# Altium PCB SolarNode.PcbDoc (part 2 of 2)
Units mil, origin at the board's own origin, x right, y up, seen from the top; angles counter-clockwise.
Board outline 7250 x 4975 mil, 2 copper layers (Top Layer, Bottom Layer); 206 components, 187 nets, 727 pads, 156 vias.
Unrouted connection lines stored in the file: 1.
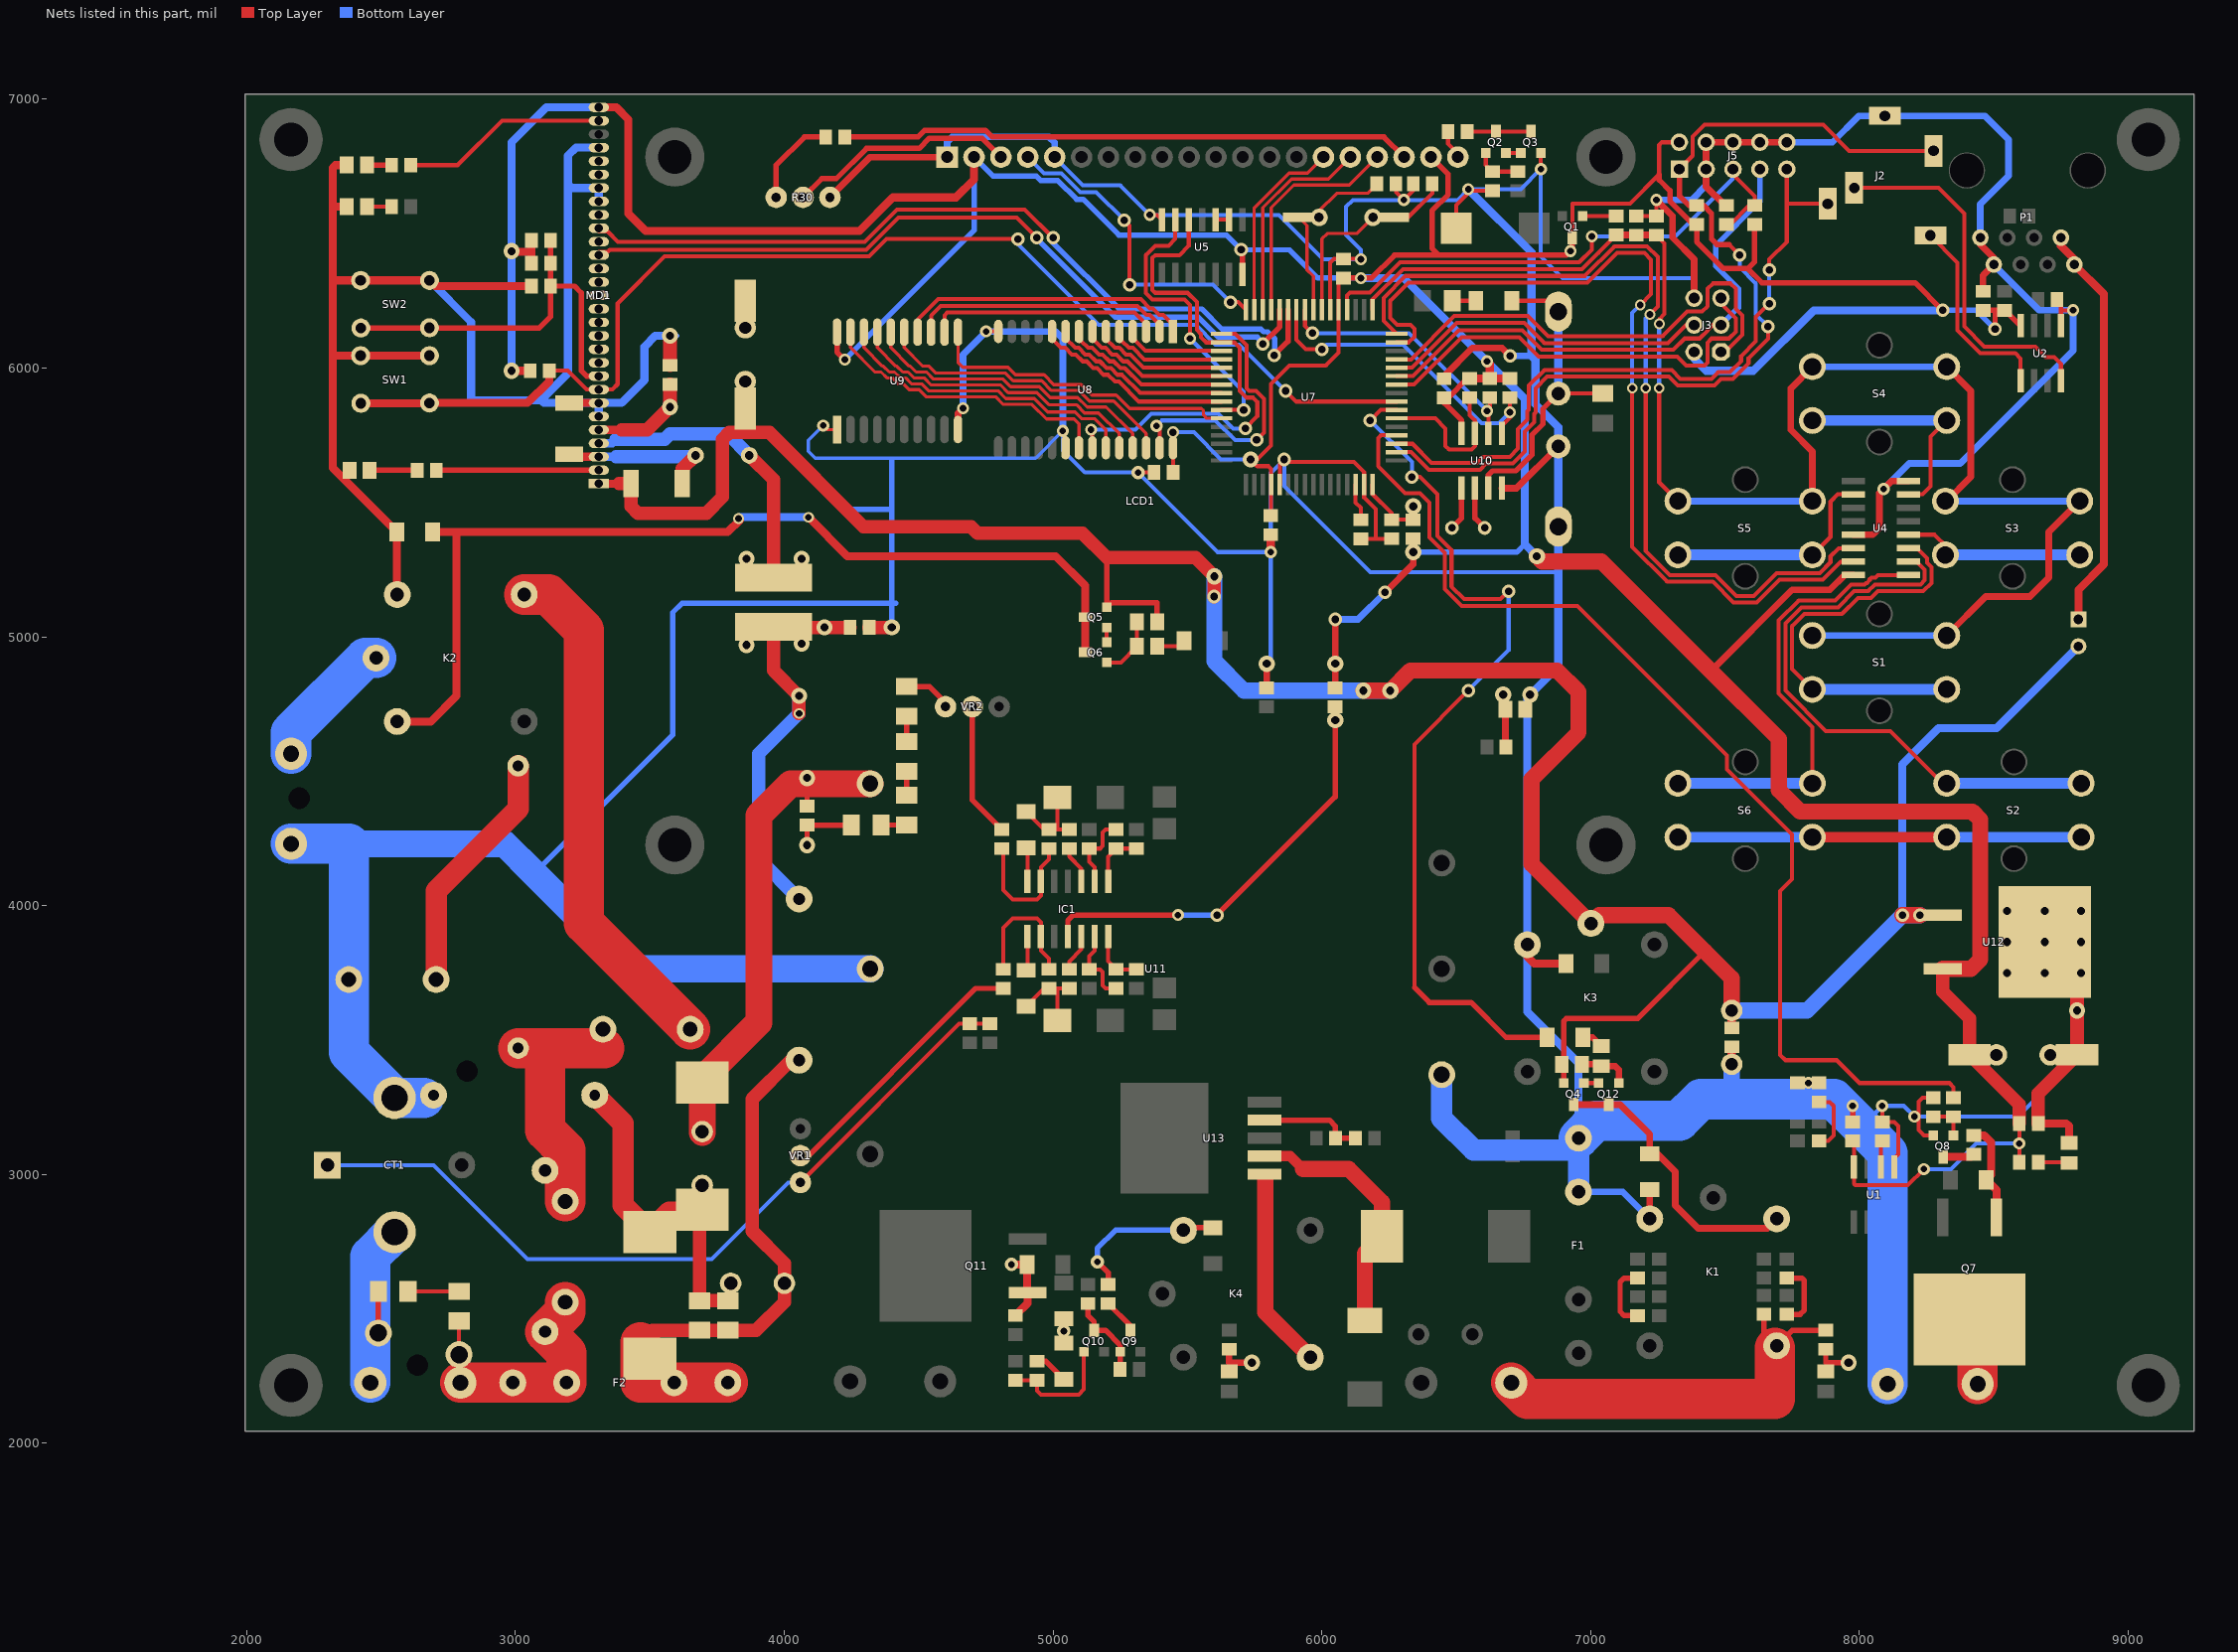
[diagram p2: the nets of this part, all layers, seen from the top]

## Via types
v1: diameter 50, hole 28, Top Layer to Bottom Layer, 46 vias
v2: diameter 60, hole 30, Top Layer to Bottom Layer, 35 vias
v3: diameter 45, hole 25, Top Layer to Bottom Layer, 29 vias
v4: diameter 50, hole 25, Top Layer to Bottom Layer, 24 vias
v5: diameter 40, hole 25, Top Layer to Bottom Layer, 9 vias
v6: diameter 60, hole 32, Top Layer to Bottom Layer, 8 vias
v7: diameter 45, hole 24, Top Layer to Bottom Layer, 4 vias
v8: diameter 45, hole 28, Top Layer to Bottom Layer, 1 vias

## Nets (pads, with @x,y where several pads share a name; then routed paths per layer and width w, separated by ;. In a path a pad name is that pad's centre, name@x,y a point inside that pad or via, vN(x,y) a via of type N, cw(c..) or ccw(c..) an arc to the next point about the centre after c; other vN are vias at no path point) (continued)
GND: B1.2 C1.2 C2.2 C4.2 C10.2 C11.2 C12.2 C13.2 C14.2 C19.2 C20.2 C21.2 C22.1 C23.2 C24.2 C25.1 C26.1 C27.2 C29.2 C35.1 C36.2 C37.2 C38.2 C39.2 C41.2 CT1.2 D3.1 D4.1 D5.1 D9.1 F1.1 J2.1 J3.6 J5.3 J5.4 J5.6 J5.8 J5.10 J7.2 J8.2 K1.5 K2.4 K3.5 L5.2 L6.2 L9.2 L15.2 LCD1.1 LCD1.5 LED1.2 LED2.2 LED3.2 LED5.2 LED6.2 MD1.6 MD1.7 MD1.22 MD1.23 MD1.26 P1.1 P1.2 Q3.2 Q8.2 R6.2 R30.1 R32.1 R35.1 R57.1 R72.2 SC1.2 SW1.2 SW1.3 SW2.2 SW2.3 U1.5 U2.5 U4.8 U4.13 U5.7 U7.22 U7.53 U7.63 U8.14 U8.20 U9.1 U9.10 U10.4 U11.2 U11.4 U12.4 | length 39511.2
  Top Layer w12: v3(4145,5786.25) 4160,5771.25 U9.1@4196.42,5771.25
  Top Layer w15: v7(4751.42,6136.25) U8.14@4796.42,6136.25 ; v4(5316.42,5611.25) C19.2@5375.99,5611.25 ; v3(5360,6570) 5387.36,6570 U5.7@5405,6552.36 ; U7.53@5843.42,5566.25 5843.42,5643.42 v1(5860,5660) 5870,5650 6120,5650 6157.42,5612.58 U7.63@6157.42,5566.25 6157.42,5517.58 6200,5475 6200,5365 ; U7.22@6031.42,6217.25 6031.42,6391.42 6045.79,6405.79 C24.2@6080,6405.79 6144.21,6405.79 v3(6145,6405) ; C21.2@6145,5364.57 6259.64,5364.57 C22.1@6260,5364.92 ; C26.1@6275.87,6685.36 6275.87,6654.49 v3(6305,6625.36) 6340,6660.36 C25.1@6340,6685.36 ; C13.2@6500,6520.36 6500,6605.36 6554.57,6659.92 R35.1@6635,6659.92 ; v3(6815,6740.36) Q3.2@6815,6800.36 ; R32.1@7170,6565.36 C14.2@7245,6565.36 v3(7245,6625.36) ; v3(8085,3255) C2.2@8085,3195.43 8129.57,3195.43 8145,3180 8145,3075 8130,3060 U1.5@8130,3027.36 ; Q8.2@8275,3145 8240,3145 8220,3165 8220,3270 8235.43,3285.43 R57.1@8275,3285.43 ; R72.2@8735.43,6255 8750,6240.43 8750,6215 ; U2.5@8750,6157.36 8750,6215 ; v3(8795,6215) 8750,6215
  Top Layer w20: C4.2@7770,3340.43 R6.2@7850,3340.43 ; C1.2@7975,3195.43 v3(7975,3255)
  Top Layer w25: R30.1@4170,6635 4319.88,6784.88 LCD1.1@4606.02,6784.88 ; U9.10@4646.42,5771.25 4646.42,5831.42 v3(4665,5850) ; L15.2@5795,4810.43 v2(5795,4900) ; C27.2@6455,5960.43 6455,5970 6560,6075 6670,6075 v1(6700,6045) ; U10.4@6670,5552.99 6724.49,5552.99 SC1.2@6880,5708.5 ; F1.1@6955,2935 F1.1@6963.07,2943.07 ; K1.5@7220,2835 D4.1@7220,2943.07 ; v3(7245,6625.36) 7305,6565.36 7305,6485 7385,6405 J3.6@7385,6260 ; C20.2@7505,6605.43 7499.57,6605.43 7430,6675 J5.3@7430,6740 J5.4@7430,6840 J5.6@7530,6840 J5.8@7630,6840 J5.10@7730,6840 ; U4.13@7977.64,5380 8050,5380 8075,5405 8075,5535 v3(8090,5550) 8120,5580 U4.8@8182.36,5580 ; P1.1@8450,6485 8450,6460 8500,6410 P1.2@8500,6385 8460,6345 C10.2@8460,6285.43
  Top Layer w30: 2320,6600 LED3.2@2372.6,6600 ; 2321,6046 SW1.3@2424,6046 SW1.2@2680,6046 ; 2324,6326 SW2.3@2424,6326 SW2.2@2680,6326 2701,6305 C29.2@3059.57,6305 ; LED2.2@2372.6,6755 2330,6755 2320,6745 2320,5628.07 D5.1@2558.07,5390 2558.07,5159.37 K2.4@2560,5157.44 ; D3.1@3200,5870.47 3309.53,5870.47 MD1.7@3310,5870 ; v3(5810,5315.36) C23.2@5810,5379.92 ; K3.5@6765,3855 6765,3810 6790,3785 D9.1@6908.07,3785 ; C36.2@7525,3410 C37.2@7525,3474.57 ; C39.2@8665.43,3190 8770,3190 8780,3180 LED6.2@8780,3117.4
  Top Layer w50: L6.2@3575,6010.43 v2(3575,6120) ; L5.2@4315.43,5035 v2(4400,5035) ; C39.2@8665.43,3190 8665.43,3300.43 C38.2@8810,3445 v2(8810,3610) 8810,3744.76 v2(8689.76,3865)
  Bottom Layer w12: v3(4145,5786.25) 4090,5731.25 4090,5690 4115,5665 4935.17,5665 v7(5036.42,5766.25)
  Bottom Layer w15: LCD1.5@5006.1,6784.88 5110.99,6680 5250,6680 v3(5360,6570) 5840,6570 6005,6405 v3(6145,6405) 6145,6440 6090,6495 6090,6600 6115.36,6625.36 v3(6305,6625.36) 6505.36,6625.36 v3(6545,6665) 6739.64,6665 v3(6815,6740.36) 6815,6415 6895,6335 7385,6335 ; v7(5036.42,5766.25) 5036.42,5693.58 5118.75,5611.25 v4(5316.42,5611.25) 5612.32,5315.36 v3(5810,5315.36) ; v2(5795,4900) 5810,4915 v3(5810,5315.36) ; 6875,5240 6180,5240 5860,5560 v1(5860,5660) 5810,5610 v3(5810,5315.36) ; 8005,3180 8010,3180 v3(8085,3255) 8165,3255 v3(8205,3215) 8590,3215 8815,3440
  Bottom Layer w20: 3070,4120 3585,4635 3585,5090 3620,5125 4400,5125 ; v2(3575,6120) v2@3600,6120 ; 4245,5475 4400,5475 ; v2(4400,5035) 4400,5125 ; 4400,5660 4400,5475 ; 4415,5125 4400,5125 ; 4400,5125 4400,5475
  Bottom Layer w25: LCD1.1@4606.02,6784.88 4606.02,6841.02 4625,6860 4985,6860 5006.1,6838.9 LCD1.5@5006.1,6784.88 ; v3(4665,5850) 4665,6049.83 v7(4751.42,6136.25) 5008.75,6136.25 5036.42,6108.58 v7(5036.42,5766.25) ; v1(6700,6045) 6780,6045 ; F1.1@6955,2935 7120,2935 K1.5@7220,2835 ; v3(7245,6625.36) 7375.36,6625.36 7430,6680 J5.3@7430,6740 ; J3.6@7385,6260 7385,6335 ; J5.10@7730,6840 7900,6840 7998.07,6938.07 J2.1@8095,6938.07 8466.93,6938.07 8555,6850 8555,6715 8450,6610 P1.1@8450,6485 ; v3(8090,5550) 8185,5645 8375,5645 8795,6065 v3(8795,6215) 8670,6215 P1.2@8500,6385
  Bottom Layer w30: SW2.2@2680,6326 2835,6171 2835,5880 3095,5880 ; MD1.6@3310,5820 MD1.7@3310,5870 ; MD1.22@3310,6620 MD1.23@3310,6670 3210,6670 3195,6685 ; MD1.26@3310,6820 3225,6820 3195,6790 3195,6685 ; v2(3575,6120) 3520,6120 3480,6080 3480,5955 3395,5870 MD1.7@3310,5870 ; v3(6545,6665) 6780,6430 6780,6045 6795,6030 6795,5865 6880,5780 SC1.2@6880,5708.5 B1.2@6880,5410.36 6880,4890 v6(6775,4785) 6765,4775 K3.5@6765,3855 6765,3605 6955,3415 F1.1@6955,3135 ; 3095,5880 3195,5980 3195,6685 ; 3095,5880 3105,5870 MD1.7@3310,5870
  Bottom Layer w60: 7520,3280 7525,3285 C36.2@7525,3410
  Bottom Layer w80: U11.4@6445.98,3371.3 6445.98,3209.02 6565,3090 6910,3090 F1.1@6955,3135 F1.1@6955,2935
  Bottom Layer w100: 2380,4230 2960,4230 3070,4120 3425,3765 U11.2@4320,3765
  Bottom Layer w150: J7.2@2165,4230 2380,4230 L9.2@2380,3725 2380,3455 CT1.2@2550,3285 C35.1@2660,3285 ; F1.1@6955,3135 7020,3200 7330,3200 7410,3280 7520,3280 7905,3280 8005,3180 8105,3080 J8.2@8105,2220
  other v2: 8550,3750 8689.76,3750 8825,3750 8550,3865 8825,3865 8550,3980 8689.76,3980 8825,3980
  other v3: 7810,3340.43
IO_0: MD1.10
IO_1: MD1.11
IO_2: MD1.12
IO_3: MD1.13
IO_4: MD1.14
IO_5: MD1.15
IO_6: MD1.16
IO_7: MD1.17
IO_8: MD1.18 U7.28 | length 2876.1
  Top Layer w15: MD1.18@3310,6432.5 3343.03,6432.5 3350.53,6440 4305,6440 4425,6560 4865,6560 v1(4940,6485)
  Top Layer w20: v1(5780,6090) 5843.42,6153.42 U7.28@5843.42,6217.25
  Bottom Layer w20: v1(4940,6485) 4940,6481.36 5231.36,6190 5540,6190 5615,6115 5760,6115 5780,6095 v1(5780,6090)
IO_9: MD1.19
IO_10: MD1.20 U7.27 | length 3044.2
  Top Layer w15: MD1.20@3310,6507.5 3343.03,6507.5 3380.53,6470 4299.64,6470 4419.64,6590 4895.1,6590 5000,6485.1 v1(5000,6485)
  Top Layer w20: v1(5822.43,6047.57) 5874.42,6099.57 U7.27@5874.42,6217.25
  Bottom Layer w20: v1(5000,6485) 5000,6466 5245,6221 5280,6221 5281,6220 5553.84,6220 5628.84,6145 5773.84,6145 5783.84,6135 5798.64,6135 5825,6108.64 5825,6050.15 v1(5822.43,6047.57)
IO_11: MD1.21
LCD_CS1: LCD1.15 U7.31 | length 714.7
  Top Layer w12: U7.31@5748.42,6217.25 5748.42,6596.09 5877.69,6725.36 5946.57,6725.36 LCD1.15@6006.1,6784.88
LCD_CS2: LCD1.16 U7.30 | length 783.2
  Top Layer w12: U7.30@5780.42,6217.25 5780.42,6596.98 5886.8,6703.36 6024.57,6703.36 LCD1.16@6106.1,6784.88
LCD_DMA_EN: U5.6 U7.42 | length 1087.2
  Top Layer w15: U5.6@5455,6552.36 5455,6480 5430,6455 5379.64,6455 5345,6420.36 5345,6279.64 5369.64,6255 5489.64,6255 5510,6234.64 v3(5510,6110) ; U7.42@5626.42,5844.25 v1(5709.25,5844.25)
  Bottom Layer w15: v3(5510,6110) 5709.25,5910.75 v1(5709.25,5844.25)
LCD_RS: LCD1.4 U7.32 | length 1175.3
  Top Layer w15: v1(5265,6550) 5285,6530 v1(5285,6310) ; v1(5660,6245) 5689.67,6245 U7.32@5717.42,6217.25
  Bottom Layer w15: LCD1.4@4906.1,6784.88 4965.99,6725 5030.63,6725 5100.63,6655 5160,6655 v1(5265,6550) ; v1(5285,6310) 5595,6310 v1(5660,6245)
LCD_RST: LCD1.17 U7.29 | length 852.2
  Top Layer w12: U7.29@5811.42,6217.25 5811.42,6596.86 5895.91,6681.36 6102.57,6681.36 LCD1.17@6206.1,6784.88
MCU_RST: C20.1 J5.5 R36.1 U7.20 | length 1999.5
  Top Layer w15: U7.20@6094.42,6217.25 6094.42,6269.78 6105,6280.36 6178.93,6280.36 6291.43,6392.86 6957.5,6392.86 7005,6440.36 v3(7005,6490) ; C20.1@7505,6534.57 7519.57,6534.57 7590.43,6605.43 R36.1@7610,6605.43 7610,6640 7530,6720 J5.5@7530,6740
  Bottom Layer w15: v3(7005,6490) 7315,6490 7530,6705
MCU_SS: J3.5 U7.10 | length 1621.9
  Top Layer w15: U7.10@6278.42,5938.25 6343.25,5938.25 6520.36,6115.36 6735,6115.36 6807.5,6042.86 7322.14,6042.86 7355,6010 7424.64,6010 7435,6020.36 7435,6095 7450,6110 7515,6110 7540,6135 7540,6185 7485,6240 J3.5@7485,6260
MISO: J3.1 U7.13 | length 1775.2
  Top Layer w15: U7.13@6278.42,6032.25 6331.18,6032.25 6492.42,6193.49 6766.87,6193.49 6842.5,6117.86 7267.86,6117.86 7360,6210 7415,6210 7435,6230 7435,6295 7455,6315 7520,6315 7540,6295 7540,6220.36 7565,6195.36 7565,6124.64 7500.36,6060 J3.1@7485,6060
MOSI: J3.4 U7.12 | length 1236.1
  Top Layer w15: U7.12@6278.42,6001.25 6335.54,6001.25 6502.64,6168.36 6752.71,6168.36 6828.21,6092.86 7287.86,6092.86 7356.51,6161.51 7383.49,6161.51 J3.4@7385,6160
NetC2_1: C2.1 U1.6 | length 99.3
  Top Layer w15: U1.6@8080,3027.36 8080,3119.57 C2.1@8085,3124.57
NetC5_1: C5.1 D8.2 R7.1 R8.2 | length 307.8
  Top Layer w15: D8.2@4900,3625.71 4966.5,3692.2 5015,3692.2 ; C5.1@5016.57,3572.64 5016.57,3690.63 5015,3692.2 ; R8.2@5060,3692.2 5015,3692.2
NetC7_1: C7.1 D10.2 R13.1 R20.2 | length 307.8
  Top Layer w15: D10.2@4900,4349.57 4966.5,4283.07 5015,4283.07 ; C7.1@5016.57,4402.64 5016.57,4284.65 5015,4283.07 ; R20.2@5060,4283.07 5015,4283.07
NetC21_1: C21.1 U7.62 | length 138.9
  Top Layer w15: U7.62@6125.42,5566.25 6125.42,5499.58 6145,5480 C21.1@6145,5435.43
NetC22_2: C22.2 L14.2 U7.64 | length 289.3
  Top Layer w15: U7.64@6188.42,5566.25 6188.42,5531.58 6260,5460 C22.2@6260,5435.79 L14.2@6340,5435.79 v6(6340,5485)
NetC25_2: C25.2 U7.23 Y3.1 Y4.1 | length 703.7
  Top Layer w12: U7.23@6000.42,6217.25 6000.42,6480.78 6020,6500.36 6130,6500.36 Y3.1@6190,6560.36
  Top Layer w15: Y4.1@6265,6560.36 6320,6560.36 6410.87,6651.22 C25.2@6410.87,6685.36
NetC26_2: C26.2 U7.24 Y3.2 Y4.2 | length 646.7
  Top Layer w12: Y4.2@5915,6560.36 5945,6530.36 5945,6365.36 5968.42,6341.93 U7.24@5968.42,6217.25 ; Y3.2@5990,6560.36 5990,6585.36 6055,6650.36 6170,6650.36 C26.2@6205,6685.36
NetC31_2: C31.2 L4.2 L5.1 | length 1523.2
  Top Layer w50: L4.2@3960,5036.93 3960,4875 v2(4055,4780) v5(4055,4715) ; L4.2@3961.93,5035 v2(4150,5035) L5.1@4244.57,5035
  Bottom Layer w50: C31.2@4055,4025 3905,4175 3905,4565 v5(4055,4715) v2(4055,4780)
  other v2: 3860,4970 4065,4975
NetC32_1: C32.1 C33.1 L7.2 L8.1 | length 921.1
  Top Layer w150: C33.1@3010,3470 3110,3470 ; L7.2@3185,2900 3185,3090 3110,3165 3110,3470 ; 3330,3470 3110,3470
NetC33_2: C33.2 L9.1 | length 921.3
  Top Layer w80: L9.1@2705,3725 2705,4055 3010,4360 C33.2@3010,4520
NetC34_2: C34.2 C35.2 L10.2 L10A.2 L11.1 L11A.1 R58.1 | length 1242.4
  Top Layer w50: L11.1@3685,2858.78 R58.1@3685,2530.12 C34.2@3790,2530.12
  Top Layer w80: C35.2@3295,3295 3400,3190 3400,2886.22 L10.2@3500,2786.22 3572.56,2858.78 L11.1@3685,2858.78
NetCT1_1: CT1.1 R16.2 R17.2 VR1.3 | length 2932.6
  Top Layer w15: VR1.3@4060,2970 4650.43,3560.43 R17.2@4690,3560.43 R16.2@4765,3560.43
  Bottom Layer w15: CT1.1@2300,3035 2695,3035 3045,2685 3730,2685 4015,2970 VR1.3@4020,2970
NetD1_1: D1.1 R37.2 | length 88
  Top Layer w15: R37.2@6485.12,6250.36 D1.1@6573.07,6250.36
NetD4_2: D4.2 K1.4 Q4.3 Q12.3 | length 1076.5
  Top Layer w25: Q4.3@6937,3260 Q12.3@7067,3260 7110,3260 7220,3150 D4.2@7220,3076.93 7248.07,3076.93 7315,3010 7315,2885 7400,2800 7657.44,2800 K1.4@7692.44,2835
NetD5_2: D5.2 K2.5 Q5.3 Q6.3 | length 3682.8
  Top Layer w30: K2.5@2560,4685 2685,4685 2780,4780 2780,5390 ; D5.2@2691.93,5390 2780,5390 ; v5(3830,5440) 3835,5435 3790,5390 2780,5390 ; v5(4090,5445) 4235,5300 5010,5300 5120,5190 Q5.3@5120,5073 Q6.3@5120,4943
  Bottom Layer w30: v5(3830,5440) 3835,5445 v5(4090,5445)
NetD6_2: D6.2 R50.1 | length 109
  Top Layer w15: R50.1@5387.4,4965 5468.07,4965 D6.2@5488.07,4985
NetD7_1: D7.1 Q7.1 R54.2 | length 378.6
  Top Layer w30: R54.2@8425,3145.43 8464.57,3145.43 8490,3120 8490,2998.07 D7.1@8471.93,2980 8510,2941.93 Q7.1@8510,2840.16
NetD8_1: D8.1 IC1.1 | length 127.8
  Top Layer w15: D8.1@4900,3759.57 4905,3764.57 IC1.1@4905,3885.28
NetD10_1: D10.1 IC1.14 | length 127.8
  Top Layer w15: D10.1@4900,4215.71 4905,4210.71 IC1.14@4905,4090
NetD11_2: D11.2 R49.1 | length 81.6
  Top Layer w25: D11.2@6971.93,3510 7007.4,3510 R49.1@7040,3477.4
NetD12_1: D12.1 D14.1 | length 91.1
  Top Layer w20: D12.1@5040,2371.93 D14.1@5040,2463.07
  other v4: 5040,2417.5
NetD12_2: D12.2 R63.2 | length 127.9
  Top Layer w20: R63.2@4940,2305.43 4972.64,2305.43 D12.2@5040,2238.07
NetD15_1: D15.1 K4.4 R55.2 | length 603
  Top Layer w20: v4(5165,2675) 5205,2635 R55.2@5205,2590.43 ; K4.4@5485,2792.44 5494.49,2801.93 D15.1@5585,2801.93
  Bottom Layer w20: v4(5165,2675) 5165,2725 5232.44,2792.44 K4.4@5485,2792.44
NetD18_1: D18.1 Q11.1 R70.2 | length 267.2
  Top Layer w30: v4(4845,2665) D18.1@4903.07,2665 4903.07,2562.09 Q11.1@4905.16,2560 4905.16,2520.59 R70.2@4860,2475.43
NetD19_2: D19.2 L12.1 U13.2 | length 974.6
  Top Layer w40: U13.2@5786.22,3068.07 5881.93,3068.07 5930,3020
  Top Layer w60: 5930,3020 6100,3020 6223.78,2896.22 L12.1@6223.78,2770 6160,2706.22 D19.2@6160,2456.81
NetIC1_2: IC1.2 R7.2 R9.1 | length 502.3
  Top Layer w15: R9.1@4815,3763.07 4815,3917.64 4850,3952.64 4940,3952.64 4955,3937.64 IC1.2@4955,3885.28 4955,3832.64 4985,3802.64 R7.2@4985,3763.07
NetIC1_5: IC1.5 R8.1 | length 140.8
  Top Layer w15: R8.1@5060,3763.07 5060,3792.64 5105,3837.64 IC1.5@5105,3885.28
NetIC1_6: IC1.6 R11.2 R12.1 | length 289.1
  Top Layer w15: IC1.6@5155,3885.28 5155,3832.64 5135,3812.64 R12.1@5135,3763.07 5174.57,3763.07 5185,3752.64 5185,3702.64 5195.43,3692.2 R11.2@5235,3692.2
NetIC1_7: IC1.7 R10.2 R11.1 | length 209.6
  Top Layer w15: IC1.7@5205,3885.28 5205,3793.07 R11.1@5235,3763.07 R10.2@5310,3763.07
NetIC1_8: IC1.8 R22.2 R23.1 | length 209.6
  Top Layer w15: IC1.8@5205,4090 5205,4182.2 R23.1@5235,4212.2 R22.2@5310,4212.2
NetIC1_9: IC1.9 R23.2 R24.1 | length 289.1
  Top Layer w15: IC1.9@5155,4090 5155,4142.64 5135,4162.64 R24.1@5135,4212.2 5174.57,4212.21 5185,4222.64 5185,4272.64 5195.43,4283.07 R23.2@5235,4283.07
NetIC1_10: IC1.10 R20.1 | length 140.8
  Top Layer w15: R20.1@5060,4212.2 5060,4182.64 5105,4137.64 IC1.10@5105,4090
NetIC1_13: IC1.13 R13.2 R21.1 | length 502.3
  Top Layer w15: R21.1@4815,4212.21 4815,4057.64 4850,4022.64 4940,4022.64 4955,4037.64 IC1.13@4955,4090 4955,4142.64 4985,4172.64 R13.2@4985,4212.2
NetJ7_1: J7.1 K2.1 | length 510.7
  Bottom Layer w150: J7.1@2165,4565 2165,4645 2441.22,4921.22 K2.1@2481.26,4921.22
NetJ8_1: J8.1 Q7.4 | length 252.7
  Top Layer w150: Q7.4@8410,2460.24 8440,2430.24 J8.1@8440,2220
NetJP1_1: JP1.1 P1.7 P1.8 | length 1525.6
  Top Layer w30: P1.7@8750,6485 8750,6455 8800,6405 P1.8@8800,6385 8910,6275 8910,5270 8815,5175 JP1.1@8815,5065
NetK4_2: K4.2 U13.1 | length 739.4
  Top Layer w60: U13.1@5790,2990 5790,2487.44 K4.2@5957.44,2320
NetL1_2: L1.2 R14.2 | length 239
  Top Layer w20: v2(4085,4225) L1.2@4085,4299.57 R14.2@4249.45,4299.57
NetLCD1_20: LCD1.20 R33.2 | length 110.6
  Top Layer w15: R33.2@6469.57,6880.36 6469.57,6835.79 6506.1,6799.25 LCD1.20@6506.1,6784.88
NetLED1_1: LED1.1 R42.2 | length 177.2
  Top Layer w20: LED1.1@2457.4,5620 R42.2@2634.57,5620
NetLED2_1: LED2.1 R43.2 | length 92.2
  Top Layer w20: LED2.1@2447.4,6755 R43.2@2539.57,6755
NetLED3_1: LED3.1 R44.2 | length 92.2
  Top Layer w15: LED3.1@2447.4,6600 R44.2@2539.57,6600
NetLED4_1: LED4.1 R53.1 | length 134.6
  Top Layer w20: R53.1@7875,2349.57 7875,2300 v6(7960,2300)
NetLED5_1: LED5.1 R60.1 | length 141.2
  Top Layer w25: LED5.1@6682.6,4730 6682.6,4592.83 R60.1@6685.43,4590
  other v6: 6675,4785
NetLED6_1: LED6.1 R61.1 | length 115.6
  Top Layer w15: R61.1@8665.43,3045 8777.6,3045 LED6.1@8780,3042.6
NetLED7_1: LED7.1 R67.1 | length 134.6
  Top Layer w25: R67.1@5655,2349.57 5655,2300 v6(5740,2300)
NetQ1_1: Q1.1 R31.2 | length 125.2
  Top Layer w15: Q1.1@6970,6565.36 7094.57,6565.36 R31.2@7095,6565.79
NetQ2_1: Q2.1 R34.1 R35.2 | length 174.9
  Top Layer w15: Q2.1@6610,6800.36 6610,6755.79 R35.2@6635,6730.79 R34.1@6730,6730.79
NetQ2_2: Q2.2 Q3.1 | length 55
  Top Layer w15: Q2.2@6685,6800.36 Q3.1@6740,6800.36
NetQ2_3: Q2.3 Q3.3 R33.1 | length 237.6
  Top Layer w15: R33.1@6540.43,6880.36 Q2.3@6648,6880.36 Q3.3@6778,6880.36
NetQ4_1: Q4.1 Q12.2 | length 55
  Top Layer w15: Q4.1@6975,3340 Q12.2@7030,3340
NetQ5_1: Q5.1 Q6.2 | length 55
  Top Layer w15: Q6.2@5200,4980 Q5.1@5200,5035
NetQ6_1: Q6.1 R50.2 R52.1 | length 227.5
  Top Layer w15: Q6.1@5200,4905 5252.6,4905 R50.2@5312.6,4965 R52.1@5312.6,5055
NetQ8_1: Q8.1 R56.2 R57.2 | length 144.6
  Top Layer w15: R57.2@8275,3214.57 R56.2@8350,3214.57 Q8.1@8350,3145
NetQ8_3: Q8.3 R54.1 | length 117
  Top Layer w30: Q8.3@8312,3065 8415.43,3065 R54.1@8425,3074.57
NetQ9_1: Q9.1 Q10.3 R62.1 R65.2 | length 319.1
  Top Layer w20: R62.1@5130,2519.57 5130,2475 5153,2452 Q10.3@5153,2420 5195,2420 5250,2365 Q9.1@5250,2340 5250,2275.43 R65.2@5249.57,2275
NetQ9_3: Q9.3 R55.1 | length 133.9
  Top Layer w20: R55.1@5205,2519.57 5288,2436.57 Q9.3@5288,2420
NetQ10_1: Q10.1 R63.1 R64.2 | length 449.1
  Top Layer w15: R64.2@4860,2234.57 R63.1@4940,2234.57 4940,2195 4955,2180 5095,2180 5115,2200 Q10.1@5115,2340
NetQ12_1: Q12.1 R49.2 R51.1 | length 195.9
  Top Layer w25: R51.1@6967.4,3410 7032.6,3410 R49.2@7040,3402.6 7092.4,3402.6 7105,3390 Q12.1@7105,3340
NetR2_2: R2.2 R4.1 | length 252.4
  Top Layer w20: R2.2@7175,2474.57 7125.43,2474.57 7110,2490 7110,2600 7124.57,2614.57 R4.1@7175,2614.57
NetR5_2: R5.2 R6.1 | length 234.5
  Top Layer w15: R5.2@7850,3124.57 7884.57,3124.57 7905,3145 7905,3255 7890.43,3269.57 R6.1@7850,3269.57
NetR9_2: R9.2 VR1.2 | length 1012.7
  Top Layer w20: VR1.2@4060,3070 4090,3070 4712.2,3692.2 R9.2@4815,3692.2
NetR14_1: R14.1 R15.1 | length 94.9
  Top Layer w20: R14.1@4360.12,4300 4454.88,4300 R15.1@4455,4299.88
NetR15_2: R15.2 R18.2 | length 89.8
  Top Layer w20: R15.2@4455,4410.12 R18.2@4455,4499.88
NetR18_1: R18.1 R19.1 | length 94.8
  Top Layer w20: R18.1@4455,4610.12 R19.1@4455,4704.88
NetR19_2: R19.2 VR2.3 | length 184.9
  Top Layer w20: R19.2@4455,4815.12 4539.88,4815.12 4600,4755 VR2.3@4600,4740
NetR21_2: R21.2 VR2.2 | length 502.5
  Top Layer w20: VR2.2@4700,4740 4700,4393.07 R21.2@4810,4283.07
NetR28_2: R28.2 R38.1 | length 250.4
  Top Layer w20: R28.2@7730,2479.57 7779.57,2479.57 7795,2495 7795,2605 7785.43,2614.57 R38.1@7730,2614.57
NetR29_1: R29.1 R30.3 | length 348.1
  Top Layer w20: R30.3@3970,6635 3970,6755 4075,6860 R29.1@4154.57,6860
NetR47_1: R47.1 R48.2 | length 189.9
  Top Layer w15: R48.2@2600.12,2565 2600.24,2565.12 R47.1@2790,2565.12
NetR66_1: R66.1 R69.1 U13.4 | length 392.4
  Top Layer w20: U13.4@5786.22,3201.93 6028.07,3201.93 6050.87,3179.13 R69.1@6050.87,3135 R66.1@6125,3135
NetS1_1: S1.1 U4.3 | length 1535
  Top Layer w15: S1.1@7825,4805 7750,4880 7750,5040 7795,5085 7935,5085 7995,5145 8043.22,5145 8068.22,5170 8237.58,5170 8268.17,5200.59 8268.17,5259.41 8252.5,5275.08 8252.5,5292.86 8215.36,5330 U4.3@8182.36,5330
  Bottom Layer w40: S1.1@7825,4805 S1.1@8325,4805
NetS2_1: S2.1 U4.2 | length 2189.7
  Top Layer w15: U4.2@8182.36,5280 8212.23,5280 8243.17,5249.06 8243.17,5210.94 8227.23,5195 8057.86,5195 8032.86,5170 7980.36,5170 7920.36,5110 7784.64,5110 7725,5050.36 7725,4800 7875,4650 8115,4650 8310,4455 S2.1@8325,4455
  Bottom Layer w40: S2.1@8325,4455 S2.1@8825,4455
NetS3_1: S3.1 U4.4 | length 692.5
  Top Layer w15: U4.4@8202.36,5380 8280,5380 ; 8295,5365 8280,5380 ; S3.1@8325,5305 8325,5335 8280,5380
  Top Layer w40: S3.1@8820,5305 S3.1@8825,5305
  Bottom Layer w40: S3.1@8320,5305 S3.1@8815,5305
NetS4_1: S4.1 U4.7 | length 844.9
  Top Layer w15: U4.7@8202.36,5530 8235,5530 8265,5560 8265,5745 S4.1@8325,5805
  Bottom Layer w40: S4.1@7825,5805 S4.1@8325,5805
NetS5_1: S5.1 U4.10 | length 822
  Top Layer w15: S5.1@7825,5305 7892.5,5372.5 7892.5,5502.5 7920,5530 U4.10@7977.64,5530
  Bottom Layer w40: S5.1@7325,5305 S5.1@7825,5305
NetS6_1: S6.1 U4.1 | length 1711.9
  Top Layer w15: S6.1@7825,4455 7825,4664.64 7700,4789.64 7700,5060.71 7774.29,5135 7910,5135 7970,5195 8019.29,5195 8024.98,5200.69 8028.19,5200.69 8038.44,5210.94 8038.44,5214.16 8044.29,5220 8059.29,5220 8069.29,5230 U4.1@8182.36,5230
  Bottom Layer w40: S6.1@7325,4455 S6.1@7825,4455
NetU5_2: U5.2 U5.3 | length 50
  Top Layer w15: U5.3@5605,6552.36 U5.2@5655,6552.36
NetU10_1: U10.1 Y5.1 | length 162.6
  Top Layer w20: Y5.1@6483.98,5405.36 6520,5441.38 U10.1@6520,5552.99
NetU10_2: U10.2 Y5.2 | length 162.6
  Top Layer w20: U10.2@6570,5552.99 6570,5441.38 Y5.2@6606.02,5405.36
NEUTRAL_IN: CT1.4 J6.1 R48.1 R59.2 | length 752.3
  Top Layer w20: R48.1@2489.88,2565 2490,2564.88 R59.2@2490,2410
  Bottom Layer w150: J6.1@2460,2225 2460,2695 CT1.4@2550,2785
PDI: J2.2 J5.1 R25.2 U7.2 | length 3684.3
  Top Layer w15: U7.2@6278.42,5687.25 6332.4,5687.25 6397.73,5621.91 6587.98,5621.91 6611.07,5645 6710.36,5645 6755,5689.64 6755,5763.08 6790,5798.08 6790,5829.64 6795.06,5834.7 6795.06,5924.35 6838.57,5967.86 7291.08,5967.86 7323.93,5935 7460.36,5935 7485.36,5960 7529.21,5960 7587.68,6018.47 7587.68,6037.32 7660,6109.64 v1(7660,6155) ; J5.1@7330,6740 7380,6790 7380,6860.71 7424.29,6905 7865,6905 7961.85,6808.15 J2.2@8276.1,6808.15 ; 7515,6460 v1(7555,6420)
  Top Layer w20: J5.1@7330,6740 7330,6640.43 7365,6605.43 R25.2@7395,6605.43 7419.57,6605.43 7450,6575 7450,6480 7470,6460 7515,6460
  Bottom Layer w15: v1(7555,6420) 7555,6375 7615,6315 7615,6200 v1(7660,6155)
PDO: J2.4 J5.9 U7.3 | length 2544.8
  Top Layer w15: U7.3@6278.42,5718.25 6336.75,5718.25 6408.09,5646.91 6577.62,5646.91 6600.71,5670 6700,5670 6730,5700 6730,5773.43 6765,5808.43 6765,5840 6770.06,5845.06 6770.06,5934.7 6828.21,5992.86 7301.43,5992.86 7334.29,5960 7450,5960 7475,5985 7518.85,5985 7560,6026.15 7560,6045 7615,6100 7615,6190 v1(7665,6240) ; v1(7665,6365) 7665.07,6365.07 7665.07,6405.07 7730,6470 J5.9@7730,6740 ; 7731.3,6611.3 J2.4@7882.4,6611.3
  Bottom Layer w15: v1(7665,6240) v1(7665,6365)
PHASE: C32.2 F2.1 J6.2 L7.1 R47.2 R59.1 | length 884.1
  Top Layer w15: R59.1@2790,2330 R47.2@2790,2454.88
  Top Layer w150: J6.2@2795,2225 F2.1@2990,2225 F2.1@3190,2225 3190,2335 C32.2@3110,2415 3185,2490 L7.1@3185,2525
PHASE_FIR1: L1.1 L11.2 L11A.2 U11.3 | length 1814.2
  Top Layer w20: L1.1@4085,4370.43 v2@4085,4453.98
  Top Layer w100: L11A.2@3695,3155.63 3695,3355 3905,3565 3905,4335 4023.98,4453.98 U11.3@4320,4453.98
  other v2: 4085,4475
PHASE_FIR2: K2.3 L8.2 | length 1926
  Top Layer w150: K2.3@3032.44,5157.44 3122.56,5157.44 3255,5025 3255,3935 L8.2@3650,3540
PHASE_FUS: C31.1 C34.1 F2.2 L10.1 L10A.1 R58.2 | length 2079.5
  Top Layer w50: L10.1@3465,2375 3509.88,2419.88 R58.2@3685,2419.88 C34.1@3790,2419.88 3894.88,2419.88 4000.63,2525.63 L10A.1@4000.63,2595 ; L10A.1@3995.63,2600 4000.63,2605 4000.63,2669.37 3880,2790 3880,3280 C31.1@4025,3425
  Top Layer w150: L10.1@3465,2375 3465,2225 F2.2@3790,2225
PKD: MD1.28 R43.1 | length 767.9
  Top Layer w15: R43.1@2610.43,6755 2785,6755 2950,6920 MD1.28@3310,6920
PL_RST-: C28.1 C29.1 MD1.9 R46.2 SW2.1 SW2.4 | length 1495.4
  Top Layer w20: SW2.4@2425,6149 3089,6149 3130.43,6190.43 C29.1@3130.43,6305 ; C28.1@3130.43,6475 R46.2@3130.43,6390 C29.1@3130.43,6305 ; MD1.9@3310,5970 3265,5970 3245,5990 3245,6280 3220,6305 C29.1@3130.43,6305
PL_SVC-: MD1.8 R45.2 SW1.1 SW1.4 U7.8 | length 4625.6
  Top Layer w15: R45.2@3125.43,5990 3195,5990 3265,5920 MD1.8@3310,5920 3360,5920 3380,5940 3380,6240 3555,6415 4315.36,6415 4380.36,6480 v1(4870,6480) ; v1(5865,5915) 5904.75,5875.25 U7.8@6278.42,5875.25
  Top Layer w30: SW1.4@2425,5869 2679,5869 SW1.1@2680,5870 3045,5870 3125.43,5950.43 R45.2@3125.43,5990
  Bottom Layer w15: v1(4870,6480) 4870,6460 5170,6160 5531.11,6160 5603.61,6087.5 5692.5,6087.5 v1(5865,5915)
RAM_A0: U8.21 U9.19 | length 1113.6
  Top Layer w12: U9.19@4246.42,6133.45 4246.42,6076.25 4337.42,5985.25 4360.21,5985.25 4382.21,5963.25 4401.1,5963.25 4423.1,5941.25 4441.98,5941.25 4463.98,5919.25 4501.76,5919.25 4527.76,5893.25 4786.42,5893.25 4814.92,5864.75 4921.16,5864.75 4975.54,5810.37 5077.85,5810.37 5096.42,5791.8 U8.21@5096.42,5703.18
RAM_A1: U8.23 U9.18 | length 1151.3
  Top Layer w12: U9.18@4296.42,6133.45 4296.42,6076.25 4365.42,6007.25 4369.32,6007.25 4391.32,5985.25 4410.21,5985.25 4432.21,5963.25 4451.1,5963.25 4473.1,5941.25 4510.87,5941.25 4536.87,5915.25 4795.53,5915.25 4824.03,5886.75 4930.27,5886.75 4980.09,5836.92 5082.41,5836.92 5108.08,5811.25 5155.87,5811.25 5196.42,5770.7 U8.23@5196.42,5703.18
RAM_A2: U8.24 U9.17 | length 1142.8
  Top Layer w12: U9.17@4346.42,6133.45 4346.42,6076.25 4415.42,6007.25 4419.32,6007.25 4441.32,5985.25 4460.21,5985.25 4482.21,5963.25 4519.98,5963.25 4545.98,5937.25 4804.65,5937.25 4833.15,5908.75 4939.38,5908.75 4984.65,5863.48 5086.97,5863.48 5117.2,5833.25 5169.42,5833.25 5246.42,5756.25 U8.24@5246.42,5703.18
RAM_A3: U8.25 U9.16 | length 1142.8
  Top Layer w12: U9.16@4396.42,6133.45 4396.42,6076.25 4465.42,6007.25 4469.32,6007.25 4491.32,5985.25 4529.1,5985.25 4555.1,5959.25 4813.76,5959.25 4842.26,5930.75 4948.49,5930.75 4989.21,5890.04 5091.52,5890.04 5125.31,5856.25 5126.42,5856.25 5127.42,5855.25 5197.42,5855.25 5296.42,5756.25 U8.25@5296.42,5703.18
RAM_A4: U8.26 U9.15 | length 1142.8
  Top Layer w12: U9.15@4446.42,6133.45 4446.42,6076.25 4515.42,6007.25 4538.21,6007.25 4564.21,5981.25 4822.87,5981.25 4851.37,5952.75 4957.61,5952.75 4993.76,5916.59 5096.08,5916.59 5135.42,5877.25 5225.42,5877.25 5346.42,5756.25 U8.26@5346.42,5703.18
RAM_A5: U8.1 U9.14 | length 1092.5
  Top Layer w15: U9.14@4496.42,6133.45 4496.42,6180.4 4572.27,6256.25 5326.42,6256.25 5360.61,6222.06 5370.55,6222.06 5395.55,6197.06 5410.19,6197.06 5446.42,6160.83 U8.1@5446.42,6136.25
RAM_A6: U8.2 U9.13 | length 980.3
  Top Layer w15: U9.13@4546.42,6133.45 4546.42,6195.04 4582.63,6231.25 5313.75,6231.25 5347.94,6197.06 5360.19,6197.06 5396.42,6160.83 U8.2@5396.42,6136.25
RAM_A7: U8.3 U9.12 | length 861.7
  Top Layer w15: U9.12@4596.42,6133.45 4596.42,6196.25 4606.42,6206.25 5303.4,6206.25 5346.42,6163.22 U8.3@5346.42,6136.25
RAM_A8: U7.35 U8.4 | length 374.2
  Top Layer w15: U8.4@5296.42,6136.25 5296.42,6111.67 5343.84,6064.25 U7.35@5626.42,6064.25
RAM_A9: U7.36 U8.5 | length 442.2
  Top Layer w15: U8.5@5246.42,6136.25 5246.42,6103.58 5250,6100 5256.78,6100 5281.78,6075 5297.74,6075 5340.49,6032.25 U7.36@5626.42,6032.25
RAM_A10: U7.37 U8.6 | length 501.9
  Top Layer w15: U8.6@5196.42,6136.25 5196.42,6108.93 5230.36,6075 5246.42,6075 5271.42,6050 5287.38,6050 5336.13,6001.25 U7.37@5626.42,6001.25
RAM_A11: U7.38 U8.7 | length 565
  Top Layer w15: U8.7@5146.42,6136.25 5146.42,6108.58 5155,6100 5156.07,6100 5181.07,6075 5195,6075 5220,6050 5236.07,6050 5261.07,6025 5277.03,6025 5331.78,5970.25 U7.38@5626.42,5970.25
RAM_A12: U7.39 U8.8 | length 631.2
  Top Layer w15: U8.8@5096.42,6136.25 5096.42,6103.58 5100,6100 5105.71,6100 5130.71,6075 5145.71,6075 5170.71,6050 5184.64,6050 5209.64,6025 5225.71,6025 5250.71,6000 5266.67,6000 5328.42,5938.25 U7.39@5626.42,5938.25
RAM_A13: U7.40 U8.9 | length 689.3
  Top Layer w15: U8.9@5046.42,6136.25 5046.42,6111.67 5083.09,6075 5095.36,6075 5120.36,6050 5135.36,6050 5160.36,6025 5174.29,6025 5199.29,6000 5215.36,6000 5240.36,5975 5256.32,5975 5324.07,5907.25 U7.40@5626.42,5907.25
RAM_A14: U7.41 U8.10 | length 754.3
  Top Layer w15: U8.10@4996.42,6136.25 4996.42,6108.58 5030,6075 5045,6075 5070,6050 5085,6050 5110,6025 5125,6025 5150,6000 5163.93,6000 5188.93,5975 5205,5975 5230,5950 5245,5950 5319.75,5875.25 U7.41@5626.42,5875.25
RAM_ALE: U7.43 U9.11 | length 1528.1
  Top Layer w10: 4646.42,6021.83 4646.42,6020.83 4665,6002.25 4831.57,6002.25 4860.07,5973.75 4966.3,5973.75
  Top Layer w12: U9.11@4646.42,6133.45 4646.42,6021.83 4665,6003.25 4831.98,6003.25 4860.48,5974.75 4966.72,5974.75 5002.88,5938.59 5105.19,5938.59 5144.53,5899.25 5234.53,5899.25 5284.39,5849.39 5552.14,5849.39 5560,5841.53 5560,5825 5571.75,5813.25 U7.43@5626.42,5813.25
RAM_RD: U5.5 U7.34 U8.22 | length 1903.8
  Top Layer w15: v3(5141.42,5771.25) 5146.42,5766.25 U8.22@5146.42,5703.18 ; U5.5@5505,6552.36 5505,6455 5470,6420 5380,6420 5370,6410 5370,6290 5380,6280 5500,6280 5535,6245 5535,6141.57 5550,6126.57 5550,6115 5569.75,6095.25 U7.34@5626.42,6095.25 5675,6095.25 5695,6075.25 5695,5914.64 5719.64,5890 5745,5890 5760,5875 5760,5820 v1(5715,5775)
  Bottom Layer w15: v3(5141.42,5771.25) 5306.25,5771.25 5365,5830 5615,5830 5670,5775 v1(5715,5775)
RAM_WR: U7.33 U8.27 | length 1014.4
  Top Layer w15: v3(5385,5785) 5396.42,5773.58 U8.27@5396.42,5703.18 ; U7.33@5626.42,6127.25 5678.36,6127.25 5720,6085.6 5720,5925 5730,5915 5755.36,5915 5785,5885.36 5785,5760.15 v1(5757.43,5732.57)
  Bottom Layer w15: v3(5385,5785) 5405,5805 5604.64,5805 5677.14,5732.5 5757.35,5732.5 v1(5757.43,5732.57)
RXCOMP: L6.1 MD1.5 | length 384.8
  Top Layer w30: MD1.5@3310,5770 3395,5770
  Top Layer w50: 3395,5770 3490,5770 v2(3575,5855) L6.1@3575,5939.57
RXIN: C30.2 L4.1 MD1.4 | length 1099.9
  Top Layer w50: C30.2@3870,5675 3960,5585 L4.1@3960,5220
  Bottom Layer w30: MD1.4@3310,5720 3360,5720 3375,5735
  Bottom Layer w50: 3375,5735 3555,5735 3575,5755 3790,5755 C30.2@3870,5675
  other v2: 3860,5290 4065,5290
SCK: J3.3 J5.7 U7.11 | length 2056.1
  Top Layer w15: U7.11@6278.42,5970.25 6339.89,5970.25 6510,6140.36 6745.36,6140.36 6817.86,6067.86 7307.86,6067.86 7350,6110 7405.71,6110 7435,6139.29 7435,6140 7455,6160 J3.3@7485,6160
  Bottom Layer w20: J3.3@7485,6160 7550,6225 7550,6295 7465,6380 7465,6455 7630,6620 J5.7@7630,6740
SCL: R40.1 U7.25 U10.6 | length 986.5
  Top Layer w15: U7.25@5937.42,6217.25 5937.42,6157.58 v1(5965,6130) ; v3@6617.5,5837.86 6625,5845.36 R40.1@6625,5889.92 ; U10.6@6620,5757.72 v3@6620,5820.36
  Bottom Layer w15: v1(5965,6130) 6325.36,6130 v3(6615,5840.36)
SDA: R41.1 U7.26 U10.5 | length 1194.5
  Top Layer w15: U7.26@5905.42,6217.25 5905.42,6104.73 5940.15,6070 v1(6000,6070) ; U10.5@6670,5757.72 6670,5785.36 v3@6702.32,5817.68 ; v3(6700,5835.36) R41.1@6700,5889.92
  Bottom Layer w15: v1(6000,6070) 6017.5,6087.5 6302.5,6087.5 6595,5795 6659.64,5795 v3(6700,5835.36)
SEL_SOURCE: D11.1 U7.7 | length 3309.1
  Top Layer w15: v1(6180,5805) 6219.25,5844.25 U7.7@6278.42,5844.25 ; v1(6335,5595) 6365,5595 6430,5530 6430,5375.36 6482.5,5322.86 6482.5,5187.86 6530.36,5140 6665,5140 v1(6695,5170) ; 6345,3695 6345,4600 v1(6545,4800)
  Top Layer w20: 6345,3695 6400,3640 6555,3640 6685,3510 D11.1@6838.07,3510
  Bottom Layer w15: v1(6180,5805) 6335,5650 v1(6335,5595) ; v1(6545,4800) 6695,4950 v1(6695,5170)
SW_LAMP: R56.1 U7.4 | length 4042.8
  Top Layer w15: U7.4@6278.42,5750.25 6220.25,5750.25 6210,5740 6210,5635 6310,5535 6365,5535 6400,5500 6400,5370 6457.5,5312.5 6457.5,5177.5 6520,5115 6951.42,5115 7507.5,4558.92 7507.5,4507.04 7749.29,4265.25 7749.29,4099.29 7705,4055 7705,3445 7725,3425 7915.36,3425 8000.36,3340 8335,3340 8350,3325 R56.1@8350,3285.43
SW_SCAN1: C14.1 R31.1 R32.2 S1.2 S2.2 S3.2 S4.2 S5.2 S6.2 U7.17 | length 7670.3
  Top Layer w15: U7.17@6188.42,6217.25 6188.42,6254.49 6301.79,6367.86 6967.86,6367.86 7027.68,6427.68 7094.92,6494.92 R31.1@7095,6494.92 ; C14.1@7245,6494.49 7275,6464.49 7275,6201.26 7255.71,6181.97 v5(7255.71,6164.29) ; v5(7255,5925) 7255,5575 S5.2@7325,5505
  Top Layer w25: R31.1@7095,6494.92 7244.57,6494.92 C14.1@7245,6494.49 ; S5.2@7825,5505 7825,5690 7745,5770 7745,5925 S4.2@7825,6005 ; S1.2@8325,5005 8470,5150 8635,5150 8705,5220 8705,5390 S3.2@8820,5505 ; S3.2@8325,5505 8415,5595 8415,5915 S4.2@8325,6005
  Top Layer w40: S6.2@7825,4255 S2.2@8325,4255
  Bottom Layer w15: v5(7255,5925) 7255,6163.58 v5(7255.71,6164.29)
  Bottom Layer w25: S5.2@7325,5505 S5.2@7825,5505 ; S1.2@7825,5005 S1.2@8325,5005 ; S4.2@7825,6005 S4.2@8325,6005 ; S3.2@8320,5505 S3.2@8815,5505
  Bottom Layer w40: S6.2@7325,4255 S6.2@7825,4255 ; S2.2@8325,4255 S2.2@8825,4255
SW_SCAN2: U4.14 U7.16 | length 3310.9
  Top Layer w15: U7.16@6278.42,6127.25 6230,6175.67 6230,6260.71 6312.14,6342.86 6978.21,6342.86 7088.72,6453.37 7210.36,6453.37 7250,6413.72 7250,6229.29 v5(7220.36,6199.64) ; v5(7205,5925) 7205,5320 7295,5230 7465,5230 7542.32,5152.68 7607.32,5152.68 7692.14,5237.5 7852.96,5237.5 7892.5,5277.04 7892.5,5300 7922.5,5330 U4.14@7977.64,5330
  Bottom Layer w15: v5(7205,5925) 7205,6184.29 v5(7220.36,6199.64)
SW_SCAN3: U4.15 U7.15 | length 3398.5
  Top Layer w15: U7.15@6278.42,6095.25 6323.47,6095.25 6345,6116.78 6345,6145.36 6330,6160.36 6280.67,6160.36 6255,6186.03 6255,6250.36 6322.5,6317.86 6988.57,6317.86 7099.08,6428.37 7200,6428.37 7225,6403.37 7225,6275 v5(7185,6235) ; v5(7155,5925) 7155,5334.64 7284.64,5205 7454.64,5205 7531.97,5127.68 7617.68,5127.68 7702.5,5212.5 7863.31,5212.5 7930.81,5280 U4.15@7977.64,5280
  Bottom Layer w15: v5(7155,5925) 7155,6205 v5(7185,6235)
SWQ: R39.1 U7.6 U10.7 | length 571.5
  Top Layer w15: U7.6@6278.42,5813.25 6422.11,5813.25 6460,5775.36 6460,5710.36 6473.44,5696.91 6556.91,5696.91 6570,5710 U10.7@6570,5757.72 6570,5805 6550,5825 R39.1@6550,5889.92
TXON: MD1.2 R42.1 | length 604.6
  Top Layer w20: R42.1@2705.43,5620 MD1.2@3310,5620
TXOUT: C30.1 D2.1 D3.2 MD1.3 | length 601.5
  Top Layer w30: D3.2@3200,5679.53 3209.53,5670 MD1.3@3310,5670
  Top Layer w50: D2.1@3620.47,5570 3620.47,5625.47 C30.1@3670,5675
  Bottom Layer w30: MD1.3@3310,5670 3375,5670
  Bottom Layer w50: 3375,5670 3665,5670 C30.1@3670,5675
VA: C11.1 C12.1 C36.1 C37.1 D2.2 JP1.2 K3.1 MD1.1 Q4.2 Q5.2 R51.2 R52.2 U12.1 | length 10280
  Top Layer w20: 5200,5295 Q5.2@5200,5110 5217.6,5127.6 5387.4,5127.6 R52.2@5387.4,5055 ; Q4.2@6900,3340 6900,3570 6910,3580 7175,3580 7425,3830
  Top Layer w30: MD1.1@3310,5570 3385,5570 ; C37.1@7525,3545.43 C36.1@7525,3610
  Top Layer w50: 3385,5570 D2.2@3429.53,5570 3429.53,5485.47 3455,5460 3710,5460 3770,5520 3770,5735 3795,5760 3945,5760 4295,5410 4695,5410 4720,5385 5110,5385 5200,5295 5530,5295 v2(5600,5225) v1(5600,5150)
  Top Layer w60: v2(6155,4800) v2(6255,4800) 6330,4875 6875,4875 6955,4795 6955,4645 6780,4470 6780,4154.96 K3.1@7001.22,3933.74 7032.48,3965 7290,3965 7425,3830 7525,3730 C36.1@7525,3610 ; v1(8160,3965) v1(8225,3965)
  Bottom Layer w30: v1(8160,3965) 8160,4525 8295,4660 8510,4660 JP1.2@8815,4965
  Bottom Layer w60: v2(5600,5225) 5600,4910 5710,4800 v2(6155,4800) v2(6255,4800) ; C36.1@7525,3610 7805,3610 v1(8160,3965) v1(8225,3965)
VCC: C1.1 C10.1 C19.1 C23.1 C24.1 C27.1 C28.2 C38.1 C39.1 C41.1 J3.2 J5.2 L2.2 L14.1 LCD1.2 LCD1.19 MD1.29 Q1.3 R25.1 R36.2 R39.2 R40.2 R41.2 R45.1 R46.1 R61.2 R68.1 U1.8 U2.8 U4.16 U5.14 U7.21 U7.52 U8.28 U9.20 U10.8 U12.3 | length 21178.1
  Top Layer w15: U8.28@5446.42,5703.18 v8(5446.42,5761.25) ; C19.1@5446.85,5611.25 U8.28@5446.85,5702.75 ; C23.1@5810,5455.79 5811.42,5457.21 U7.52@5811.42,5566.25 5811.42,5625 5801.42,5635 5760,5635 v2(5735,5660) 5760,5660 5811.42,5711.42 5811.42,5941.42 5880,6010 6015,6010 6062.42,6057.42 U7.21@6062.42,6217.25 6062.42,6317.34 C24.1@6080,6334.92 ; Q1.3@6932,6485.36 6932,6612 7147,6612 7255,6720 7255,6830 7265,6840 J5.2@7330,6840 ; C1.1@7980,3119.57 U1.8@7980,3027.36 7980,2965 7985,2960 8180,2960 v3(8240,3020) ; C39.1@8594.57,3190 8595,3189.57 v3(8595,3115) R61.2@8595,3045.43
  Top Layer w20: U9.20@4196.42,6133.45 4196.42,6059.83 v3(4225,6031.25) ; U5.14@5705,6347.64 v1@5705,6440 ; C24.1@6080,6334.92 v3(6145,6334.92) 6184.92,6334.92 6270.36,6420.36 6435,6420.36 ; v6(6340,5315) L14.1@6340,5364.92 ; LCD1.19@6406.1,6784.88 6470,6720.99 6470,6645.36 6410,6585.36 6410,6445.36 6435,6420.36 ; U10.8@6520,5757.72 6520,5805.36 6455,5870.36 C27.1@6455,5889.57 6470.18,5889.57 6541.4,5960.79 R39.2@6550,5960.79 R39.2@6565,5960.79 ; Q1.3@6932,6485.36 6932,6442.36 6910,6420.36 6435,6420.36 ; 7255,6720 7255,6700 7295,6660 7295,6621.32 7381.75,6534.57 R25.1@7395,6534.57 7395,6470 7495,6370 7585,6370 ; R36.2@7610,6534.57 7610,6395 7585,6370 ; v1(8310,6215) 8207.5,6317.5 7637.5,6317.5 7585,6370 ; C10.1@8460,6214.57 8505,6214.57 ; v1(8505,6145) 8505,6214.57 ; U2.8@8600,6157.36 8542.8,6214.57 R68.1@8540,6214.57 8505,6214.57
  Top Layer w25: L2.2@6050,4810.43 v2(6050,4900) v1(6050,5065) ; v1(6235,5165) 6340,5270 v6(6340,5315) ; 7440,4880 7455,4880 7750,5175 7890,5175 7945,5230 U4.16@7977.64,5230
  Top Layer w30: v2(2985,5990) R45.1@3054.57,5990 ; v2@2987.5,6432.5 3059.57,6432.5 ; R46.1@3059.57,6390 3059.57,6432.5 ; C28.2@3059.57,6475 3059.57,6432.5 ; MD1.29@3310,6970 3375,6970 3420,6925 3420,6575 3485,6510 4280,6510 4405,6635 4640,6635 4706.1,6701.1 LCD1.2@4706.1,6784.88 ; R39.2@6565,5960.79 R40.2@6625,5960.79 ; v3(6615,6025) 6625,6015 R40.2@6625,5960.79 ; R41.2@6700,5960.79 R40.2@6625,5960.79
  Top Layer w50: U12.3@8309.84,3765 8309.84,3680.16 8410,3580 C38.1@8410,3445 8594.57,3260.43 C39.1@8594.57,3190
  Top Layer w60: v2(6800,5300) 6820,5280 7040,5280 7440,4880 7700,4620 7700,4430 7780,4350 8420,4350 8450,4320 8450,3800 8415,3765 U12.3@8309.84,3765
  Bottom Layer w15: v8(5446.42,5761.25) 5523.75,5761.25 5625,5660 v2(5735,5660) ; v3(8240,3020) 8340,3020 8435,3115 v3(8595,3115)
  Bottom Layer w20: v3(4225,6031.25) 4706.1,6512.35 LCD1.2@4706.1,6784.88 4775.99,6715 4937.09,6715 4954.59,6697.5 5017.5,6697.5 5087.5,6627.5 5112.5,6627.5 5245,6495 5645,6495 v1(5700,6440) 5880,6440 5985.08,6334.92 v3(6145,6334.92) ; v6(6340,5315) 6725,5315 6755,5345 ; v1(8310,6215) 8435,6215 v1(8505,6145)
  Bottom Layer w25: v1(6050,5065) 6135,5065 v1(6235,5165)
  Bottom Layer w30: v2(2985,5990) v2(2985,6435) 2985,6840 3115,6970 MD1.29@3310,6970 ; v3(6145,6334.92) 6305.08,6334.92 v3(6615,6025) 6755,5885 6755,5345 v2(6800,5300) ; J3.2@7385,6060 7385,6035 7430,5990 7605,5990 7830,6215 v1(8310,6215)
  other v3: 6925,6435.36
VCELL: B1.1 D1.2 R27.2 SC1.1 U10.3 | length 1205.6
  Top Layer w15: D1.2@6706.93,6250.36 6875,6250.36 B1.1@6915,6210.36 ; SC1.1@6880,5905.36 6880.24,5905.12 R27.2@7045,5905.12
  Top Layer w20: U10.3@6620,5552.99 6620,5602.5 6635,5617.5 6721.75,5617.5 6782.5,5678.25 6782.5,5751.69 6822.56,5791.74 6822.56,5847.91 SC1.1@6880,5905.36
  Bottom Layer w30: SC1.1@6880,5905.36 B1.1@6880,6210.36
VDD5A: IC1.4 L2.1 | length 1530.3
  Top Layer w20: IC1.4@5055,3885.28 5055,3945 5075,3965 v7(5465,3965) ; v1(5610,3965) 6050,4405 v2(6050,4690)
  Bottom Layer w20: v7(5465,3965) v1(5610,3965)
VEE: LCD1.18 R29.2 | length 2132.5
  Top Layer w20: R29.2@4225.43,6860 4497.62,6860 4522.62,6885 4748.41,6885 4773.41,6860 6230.99,6860 LCD1.18@6306.1,6784.88
VMAIN: J9.2 K1.3 R26.1 R53.2 | length 1548.7
  Top Layer w20: R26.1@7645,2479.57 7645,2410 K1.3@7692.44,2362.56 ; K1.3@7685,2355.12 K1.3@7692.44,2362.56 ; R53.2@7875,2420.43 7750.32,2420.43 K1.3@7692.44,2362.56
  Top Layer w150: J9.2@6705,2225 6765,2165 7685,2165 K1.3@7685,2355.12
VO: LCD1.3 R30.2 | length 856.3
  Top Layer w20: R30.2@4070,6635 4140,6705 4194.04,6705 4306.42,6817.38 4502.38,6817.38 4540,6855 4735.99,6855 LCD1.3@4806.1,6784.88
XIN: MD1.25
XOUT: MD1.24
~RXD0: J2.5 U2.1 | length 755.8
  Top Layer w15: J2.5@8264.29,6493.19 8365,6392.48 8365,6140 8450,6055 8580,6055 8600,6035 U2.1@8600,5952.64
~TXD0: J2.3 U2.4 | length 1349
  Top Layer w15: J2.3@7980.83,6670.35 8294.65,6670.35 8390,6575 8390,6155 8465,6080 8654.29,6080 8694.29,6040 8725,6040 8750,6015 U2.4@8750,5952.64
pads on no net: K2.2 LCD1.0 P1.BO1 P1.BO2 S1.0 S2.0 S3.0 S4.0 S5.0 S6.0 U4.5 U4.6 U4.9 U4.11 U4.12 U5.1 U5.8 U5.9 U5.10 U5.11 U5.12 U5.13 U7.1 U7.9 U7.18 U7.19 U11.5

## Polygon pours and split planes (outlines as drawn)
GND on Bottom Layer "Top Layer-No Net" (solid, pour order 8): 2215,5490 1995,5490 1995,6610 2215,6610 2215,5490
GND on Bottom Layer "Top Layer-No Net" (solid, pour order 6): 8920,2655 8925.51,2650 9239.49,2650 9245,2655 9245,6625 8920,6625 8920,2655
AGND on Bottom Layer "Top Layer-No Net" (solid, pour order 5): 4775,4770 4995,4770 5000,4770 5065,4705 5775,4705 5845,4705 5850,4700 5855,4695 5855,4025 5855,3485 5845,3475 5840,3470 5050,3470 4660,3470 4655,3475 4655,4180 4655,4485 4780,4610 4780,4765
GND on Bottom Layer "Top Layer-No Net" (solid, remove dead copper, pour order 7): 2195,7020 8950,7020 8950,2655 8210,2655 8040,2655 8040,3065 7890,3215 7430,3215 7425,3215 7245,3035 6445,3035 6415,3035 6330,3120 6335,3125 6335,3335 6335,3400 6345,3410 6350,3415 6595,3415 6600,3415 6750,3265 6755,3260 6865,3260 6875,3260 6915,3300 6915,3395 6670,3640 6660,3650 6660,4310 6660,4575 6425,4810 6370,4865 5735,4865 5035,4865 4960,4940 4355,4940 4205,4940 4205,5285 4205,5290 4165,5330 4150,5345 3620,5345 3580,5345 3445,5480 3435,5490 3110,5490 2195,5490 2195,7020

## Keep-outs
Keep-Out Layer:
  the board outline again, w10

## Other copper
Bottom Layer:
  rectangle net BTGND: 4830,2925 5850,3345

## Silkscreen, mask and mechanical layers (free items; w line width, h text height)
Top Overlay:
  lines w10: 7325,5635 7325,5170 7825,5170 7825,4670 8325,4670 8325,5170 8825,5170 8825,5640 8325,5640 8325,6140 7825,6140 7825,5640 7330,5640
Top Solder:
  lines w20: 3470,2400 3490,2420 3895,2420 4000.63,2525.63 4000.63,2595 4000.63,2669.37 3880,2790 3880,3280 4025,3425 4055,3425 ; 3960,5040 3960,4875 3975,4860 4055,4780 4055,4715 ; 4070,5035 4245,5035 ; 4315,5035 4400,5035
  lines w25: 5790,3005 5790,2487.44 5957.44,2320 ; 5790,3070 5880,3070 5930,3020 6100,3020 6220,2900 6220,2820 ; 6155,2180 6325,2180 6370,2225 ; 6160,2450 6160,2690 ; 6560,2405 6560,2525 6710,2675 6710,3065 ; 6710,3140 6710,3327.56 6765,3382.56
  lines w30: 2705,3725 2705,4055 3010,4360 3010,4520 ; 3295,3295 3400,3190 3400,2890 3475,2815
  lines w40: 3032.44,5157.44 3122.56,5157.44 3255,5025 3255,3935 3650,3540 ; 3695,3159.37 3695,3355 3905,3565 3905,4335 4023.98,4453.98 4320,4453.98
  lines w60: 2795,2225 3190,2225 3190,2335 3110,2415 3185,2490 3185,2525 ; 3010,3470 3330,3470 ; 3032.44,5157.44 3122.56,5157.44 3255,5025 3255,3935 3650,3540 ; 3110,3470 3110,3165 3185,3090 3185,2900 ; 3470,2390 3470,2235 3475,2230 3585,2230 3590,2225 3790,2225 ; 4580,2230 4580,2590 ; 4875,2810 5255,2810 5330,2735 5330,2695 5406.26,2618.74 5406.26,2556.22 ; 6705,2225 6765,2165 7665,2165 7692.44,2192.44 7692.44,2362.56 ; 7456.22,2913.74 7537.48,2995 7770,2995 7870,2895 7870,2830 7880,2820 7950,2820 7995,2820 ; 8110,2820 8230,2820 8285,2875 ; 8440,2220 8440,2455
Bottom Solder:
  lines w50: 2380,4565 2380,4855 2446.22,4921.22 2481.26,4921.22 ; 2460,2225 2460,2695 2550,2785 ; 2695,3295 2685,3285 2550,3285 2380,3455 2380,4230 2955,4230 3420,3765 4320,3765 ; 4245,2230 4245,2370 4320,2445 4740,2445 4860,2325 4860,2270 4965,2165 6310,2165 6370,2225 6370,2445 6475,2550 6680,2550 6800,2430 6950,2430 ; 4620,3015 4730,3125 5050,3125 ; 5406.26,2556.22 6066.22,2556.22 6310,2800 6805,2800 6885,2720 7045,2720 7220,2545 7220,2362.56 ; 6445.98,3371.3 6445.98,3194.02 6540,3100 7195,3100 7370,3275 7905,3275 8105,3075 8105,2210 ; 6955,2335 6955,2535 ; 6955,2935 6955,3135

## Text inside footprints (layer, text, board x,y; h text height)
J3: Top Overlay "1" at 7505,5980 h50 r90; Top Overlay "2" at 7405,5960 h50 r90; Top Overlay "5" at 7505,6320 h50 r90; Top Overlay "6" at 7405,6320 h50 r90
P1: Bottom Overlay "7" at 8782.45,6586.06 h50 r180; Bottom Overlay "1" at 8402.17,6599.13 h50 r180
U11: Bottom Overlay "FG" at 4430,3120 h100 r180; Bottom Overlay "N" at 4430,3800 h100 r180; Bottom Overlay "L" at 4435,4495 h100 r180; Bottom Overlay "-DC" at 6050,3420 h100 r180; Bottom Overlay "+DC" at 6030,4220 h100 r180; Bottom Overlay "COM" at 6030,3815 h100 r180